# EAGLE board BOARD_Raihansyah Akbar M. (EAGLE 9.6.2)
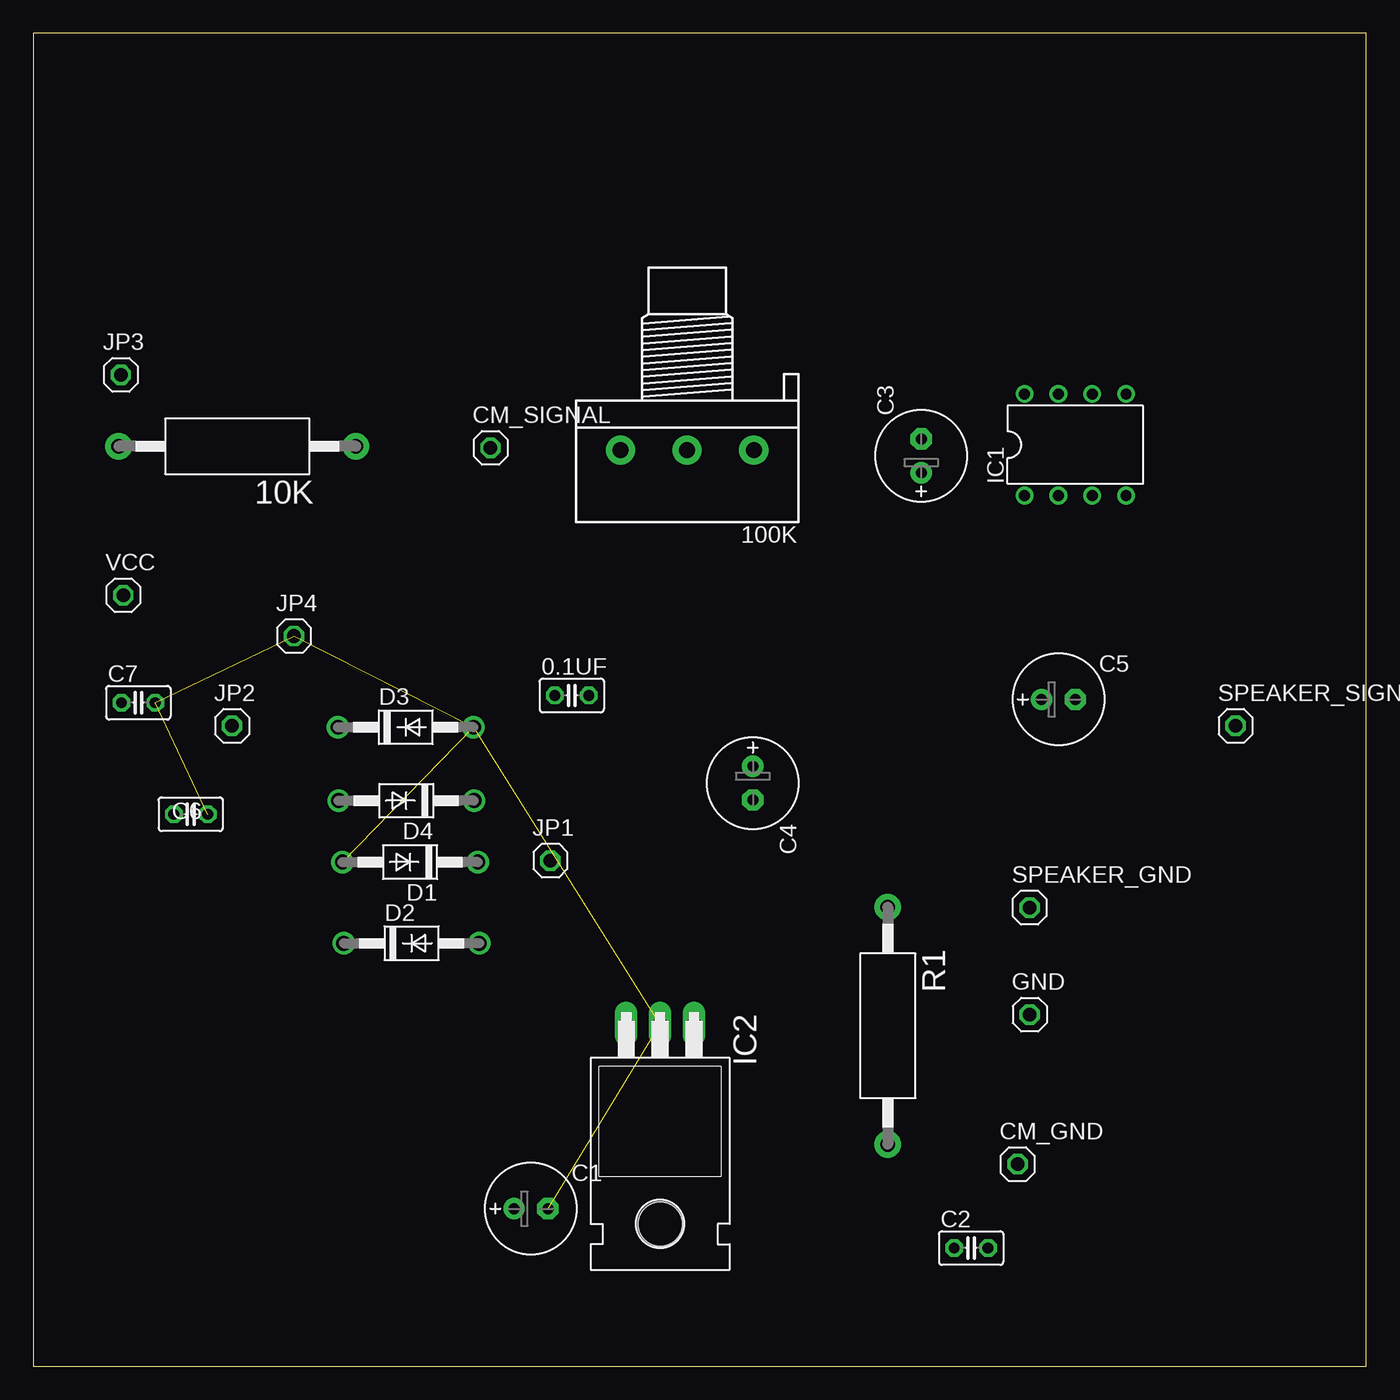
[diagram p0: board, top side]
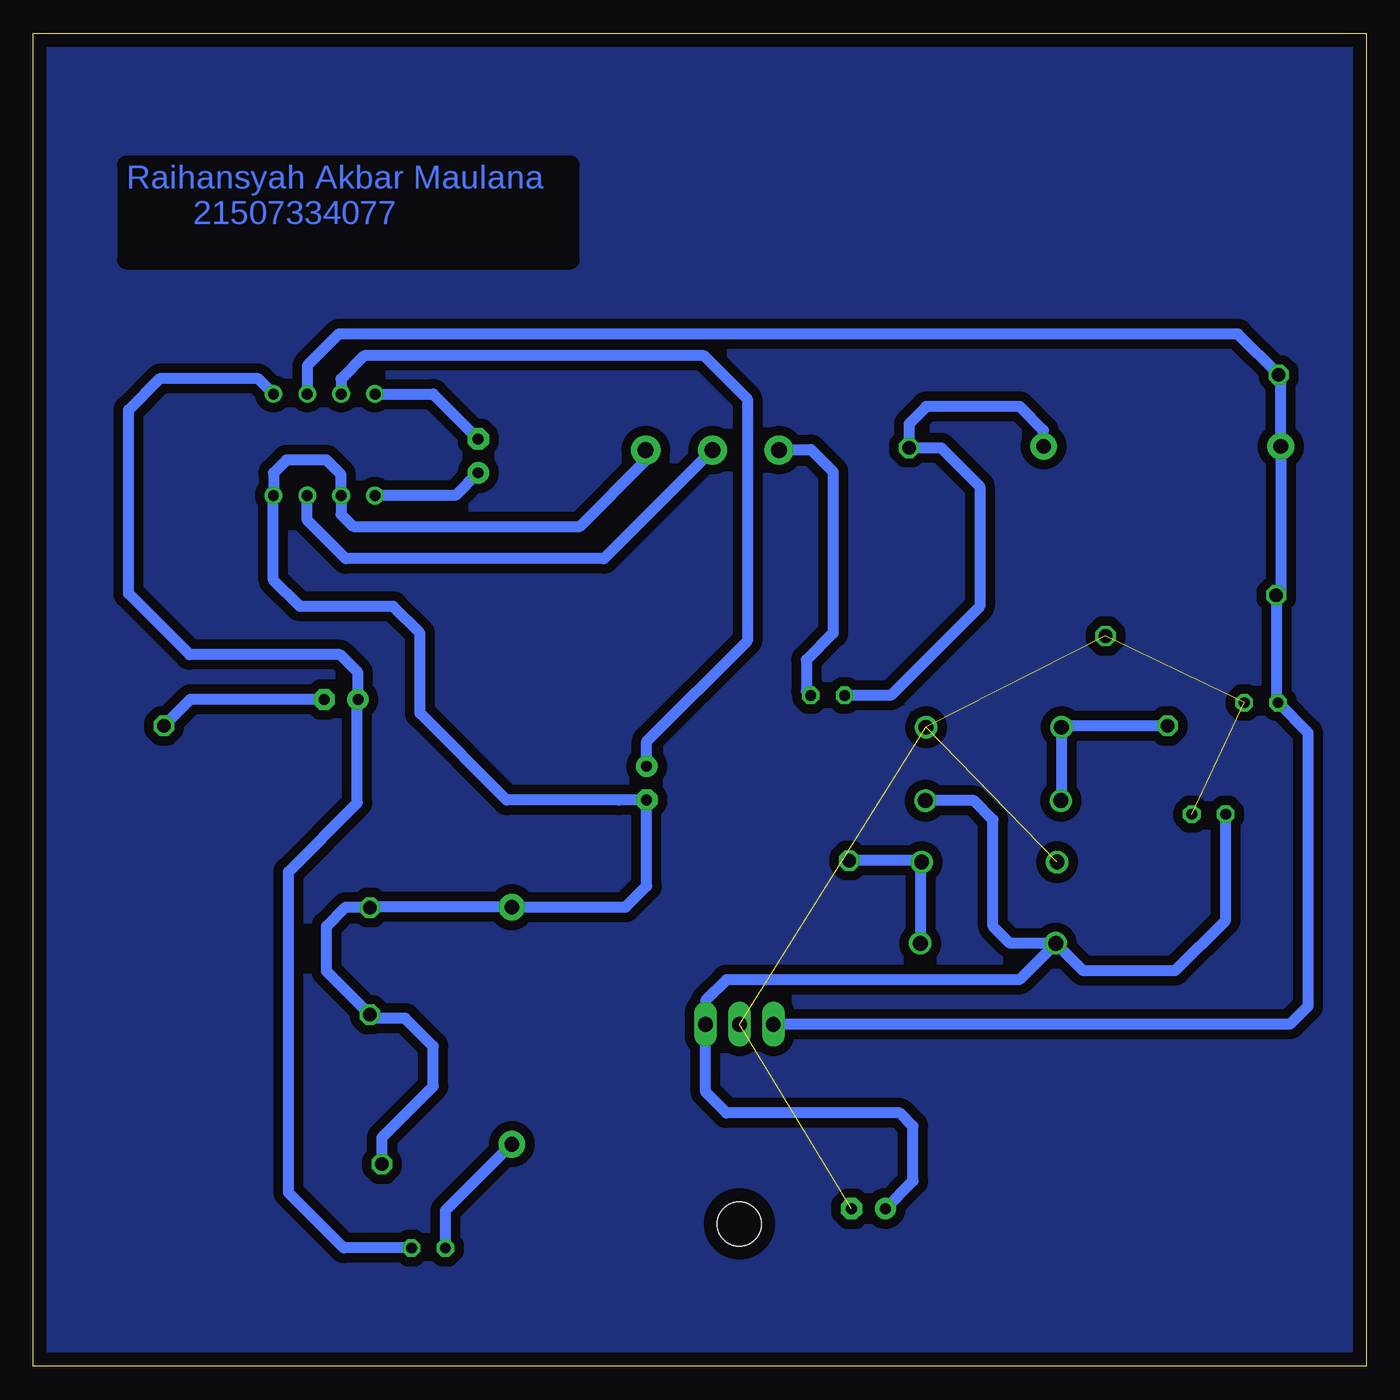
[diagram p1: board, bottom side, seen from below]

Size 100 x 100 mm. Coordinates in mm from the lower left corner, seen from the top.
Outline: 0,0 100,0 100,100 0,100 0,0
Copper layers (1*16): Top 0.035mm / dielectric 1.5mm / Bottom 0.035mm
Design rules "default *": minimum track width 6mil, minimum drill 0.35mm, track to track 28mil, track to pad 28mil, pad to pad 6mil, via to via 6mil, smd to smd 6mil, copper to edge 40mil, drill to drill 6mil, minimum pad ring 10mil, minimum via ring 8mil, stop-mask expansion 4mil, vias tented up to drill 0mil, thermal gap 10mil

## Footprints (pad centres in the part's own frame; a part is rotated, then mirrored left to right if it is on the bottom)
C025-025X050 = drill 0.813 octagon: 1 -1.27,0; 2 1.27,0
AC01 = drill 1.1 pad 2: 1 -8.9,0; 2 8.9,0
3RP/1610N = drill 1.2 pad 2.184: 1 -5,0; 2 0,0; 3 5,0
E2,5-7 = drill 0.813 pad 1.6: + -1.27,0 | drill 0.813 pad 1.6 octagon: - 1.27,0
1X01 = drill 1.016 octagon: 1 0,0
DO41-10 = drill 1.118: A 5.08,0; C -5.08,0
DIL08 = drill 0.813 pad 1.27: 1 -3.81,-3.81; 2 -1.27,-3.81; 3 1.27,-3.81; 4 3.81,-3.81; 5 3.81,3.81; 6 1.27,3.81; 7 -1.27,3.81; 8 -3.81,3.81
TO220H = drill 1.118 long: 1 -2.54,-10.16; 2 0,-10.16; 3 2.54,-10.16 | hole 3.302: 0,4.826

## Placement (x,y rotation side)
0.1UF  [C025-025X050]  40.4,50.33 0 top
10K  [AC01]  15.31,69.02 180 top
100K  [3RP/1610N]  49.05,68.73 180 top
C1  470nF  [E2,5-7]  37.34,11.82 0 top
C2  [C025-025X050]  70.36,8.86 0 top
C3  [E2,5-7]  66.62,68.3 90 top
C4  [E2,5-7]  53.98,43.75 270 top
C5  [E2,5-7]  76.91,50.02 0 top
C6  100nF  [C025-025X050]  11.81,41.41 0 top
C7  100nF  [C025-025X050]  7.88,49.78 0 top
CM_GND  [1X01]  73.84,15.15 0 top
CM_SIGNAL  [1X01]  34.3,68.9 0 top
D1  1N4004  [DO41-10]  28.27,37.82 180 top
D2  1N4004  [DO41-10]  28.38,31.72 0 top
D3  1N4004  [DO41-10]  27.94,47.94 0 top
D4  1N4004  [DO41-10]  27.98,42.43 180 top
GND  [1X01]  74.76,26.38 0 top
IC1  LM386N-3  [DIL08]  78.18,69.13 0 top
IC2  7805T  [TO220H]  47.03,15.5 180 top
JP1  9V trafo  [1X01]  38.79,37.93 0 top
JP2  0 trafo  [1X01]  14.91,48.04 0 top
JP3  5V  [1X01]  6.56,74.38 0 top
JP4  GND  [1X01]  19.55,54.78 0 top
R1  [AC01]  64.11,25.55 270 top
SPEAKER_GND  [1X01]  74.74,34.41 0 top
SPEAKER_SIGNAL  [1X01]  90.2,48.04 0 top
VCC  [1X01]  6.75,57.84 0 top

## Library data of the parts
0.1UF C1-C7 = rcl; SPICEPREFIX: C
10K R1 = resistor-power; OC_FARNELL: unknown; OC_NEWARK: unknown
100K = pot
CM_GND CM_SIGNAL GND JP1-JP4 SPEAKER_GND SPEAKER_SIGNAL VCC = pinhead
D1-D4 = diode
IC1 IC2 = linear

## Nets
ABC: C1.- C6.2 C7.2 D1.A D3.A IC2.2 JP4.1
N$1: 0.1UF.1 10K.1 CM_SIGNAL.1
N$2: C3.+ IC1.1
N$3: 0.1UF.2 100K.3
N$4: C3.- IC1.8
N$5: C2.2 C5.+ IC1.5
N$6: 100K.2 IC1.3
N$7: C2.1 R1.2
N$8: C4.+ IC1.7
N$10: D1.C D2.A JP1.1
N$11: C1.+ C6.1 D2.C D4.C IC2.1
N$12: D3.C D4.A JP2.1
SPEAKER_GND: 100K.1 C4.- CM_GND.1 GND.1 IC1.2 IC1.4 R1.1 SPEAKER_GND.1
SPEAKER_SIGNAL: C5.- SPEAKER_SIGNAL.1
VCC: 10K.2 C7.1 IC1.6 IC2.3 JP3.1 VCC.1

## Tracks (layer width: path | path; a pad name or v marks a point on that pad's centre or on a via)
ABC  (6 unrouted)
  Bottom 0.813: D1.A 23.15,37.78
GND
  pour Bottom: 0,0 0,100 100,100 100,1 100,0
N$1
  Bottom 0.813: 10K.1 24.21,70.21 26,72 33,72 34.3,70.7 CM_SIGNAL.1 31.9,68.9 29,66 29,57 35.67,50.33 0.1UF.1
N$2
  Bottom 0.813: C3.+ 68.33,65.32 IC1.1
N$3
  Bottom 0.813: 100K.3 44.01,68.77 41.67,68.77 40,67.1 40,55 42,53 42,50.66 0.1UF.2
N$4
  Bottom 0.813: IC1.8 70,72.94 C3.-
N$5
  Bottom 0.813: C2.2 76.71,8.86 80.86,13.01 80.86,37.09 75.7,42.26 75.7,49.97 | 75.7,49.97 C5.+ 75.64,52.04 76.98,53.38 88.29,53.38 92.86,57.95 92.86,71.74 90.47,74.13 83.17,74.13 IC1.5 | 75.67,49.97 75.7,49.97
N$6
  Bottom 0.813: IC1.3 79.45,63.48 76.56,60.58 57.2,60.58 100K.2
N$7
  Bottom 0.813: R1.2 69.09,11.67 C2.1
N$8
  Bottom 0.813: C4.+ 53.98,46.87 46.44,54.42 46.44,72.57 49.67,75.81 75.17,75.81 76.91,74.06 IC1.7
N$10
  Bottom 0.813: JP1.1 33.47,37.93 D1.C 33.46,37.71 D2.A
N$11
  Bottom 0.813: D2.C 21.25,29.68 14.32,29.68 10.54,33.46 C6.1 | 49.57,25 IC2.1 | D2.C 26.02,29 48,29 49.57,27.43 IC2.1 | C1.+ 34,13.89 34,18 35,19 48,19 49.57,20.57 IC2.1 | D2.C 26.73,31.73 28,33 28,41 29.43,42.43 D4.C
N$12
  Bottom 0.813: JP2.1 22.76,48.04 D3.C 22.86,42.47 D4.A
SPEAKER_GND
  Bottom 0.813: 74.74,26.1 74.74,26.59 74.84,26.48 | GND.1 74.76,26.11 74.74,26.1 | GND.1 74.74,26.39 | 74.7,34.45 R1.1 55.55,34.45 53.98,36.02 C4.- | 74.7,34.45 SPEAKER_GND.1 | C4.- 56.08,42.48 | C4.- 64.48,42.48 71,49 71,55 73,57 80,57 82,59 82,65.31 IC1.4 81.99,67.01 81,68 78,68 76.91,66.91 IC1.2 76.91,63.91 76,63 59,63 54.05,67.95 100K.1 | CM_GND.1 73.84,17.16 70,21 70,24 72.1,26.1 74.74,26.1 | GND.1 78,29.62 78,33 76.55,34.45 74.7,34.45
SPEAKER_SIGNAL
  Bottom 0.813: C5.- 88.22,50.02 SPEAKER_SIGNAL.1
VCC
  Bottom 0.813: IC2.3 5.72,25.66 4.37,27 4.37,47.54 C7.1 6.75,49.91 VCC.1 6.41,58.17 10K.2 6.41,74.23 JP3.1 9.62,77.43 77.08,77.43 79.45,75.06 IC1.6

## Text on the board
Bottom: Raihansyah Akbar Maulana / 21507334077